# Altium PCB PCB_NEW.PcbDoc
Units mil, origin at the board's own origin, x right, y up, seen from the top; angles counter-clockwise.
Board outline 6000 x 4000 mil, 2 copper layers (Top Layer, Bottom Layer); 215 components, 264 nets, 989 pads, 0 vias.
Unrouted connection lines stored in the file: 651.
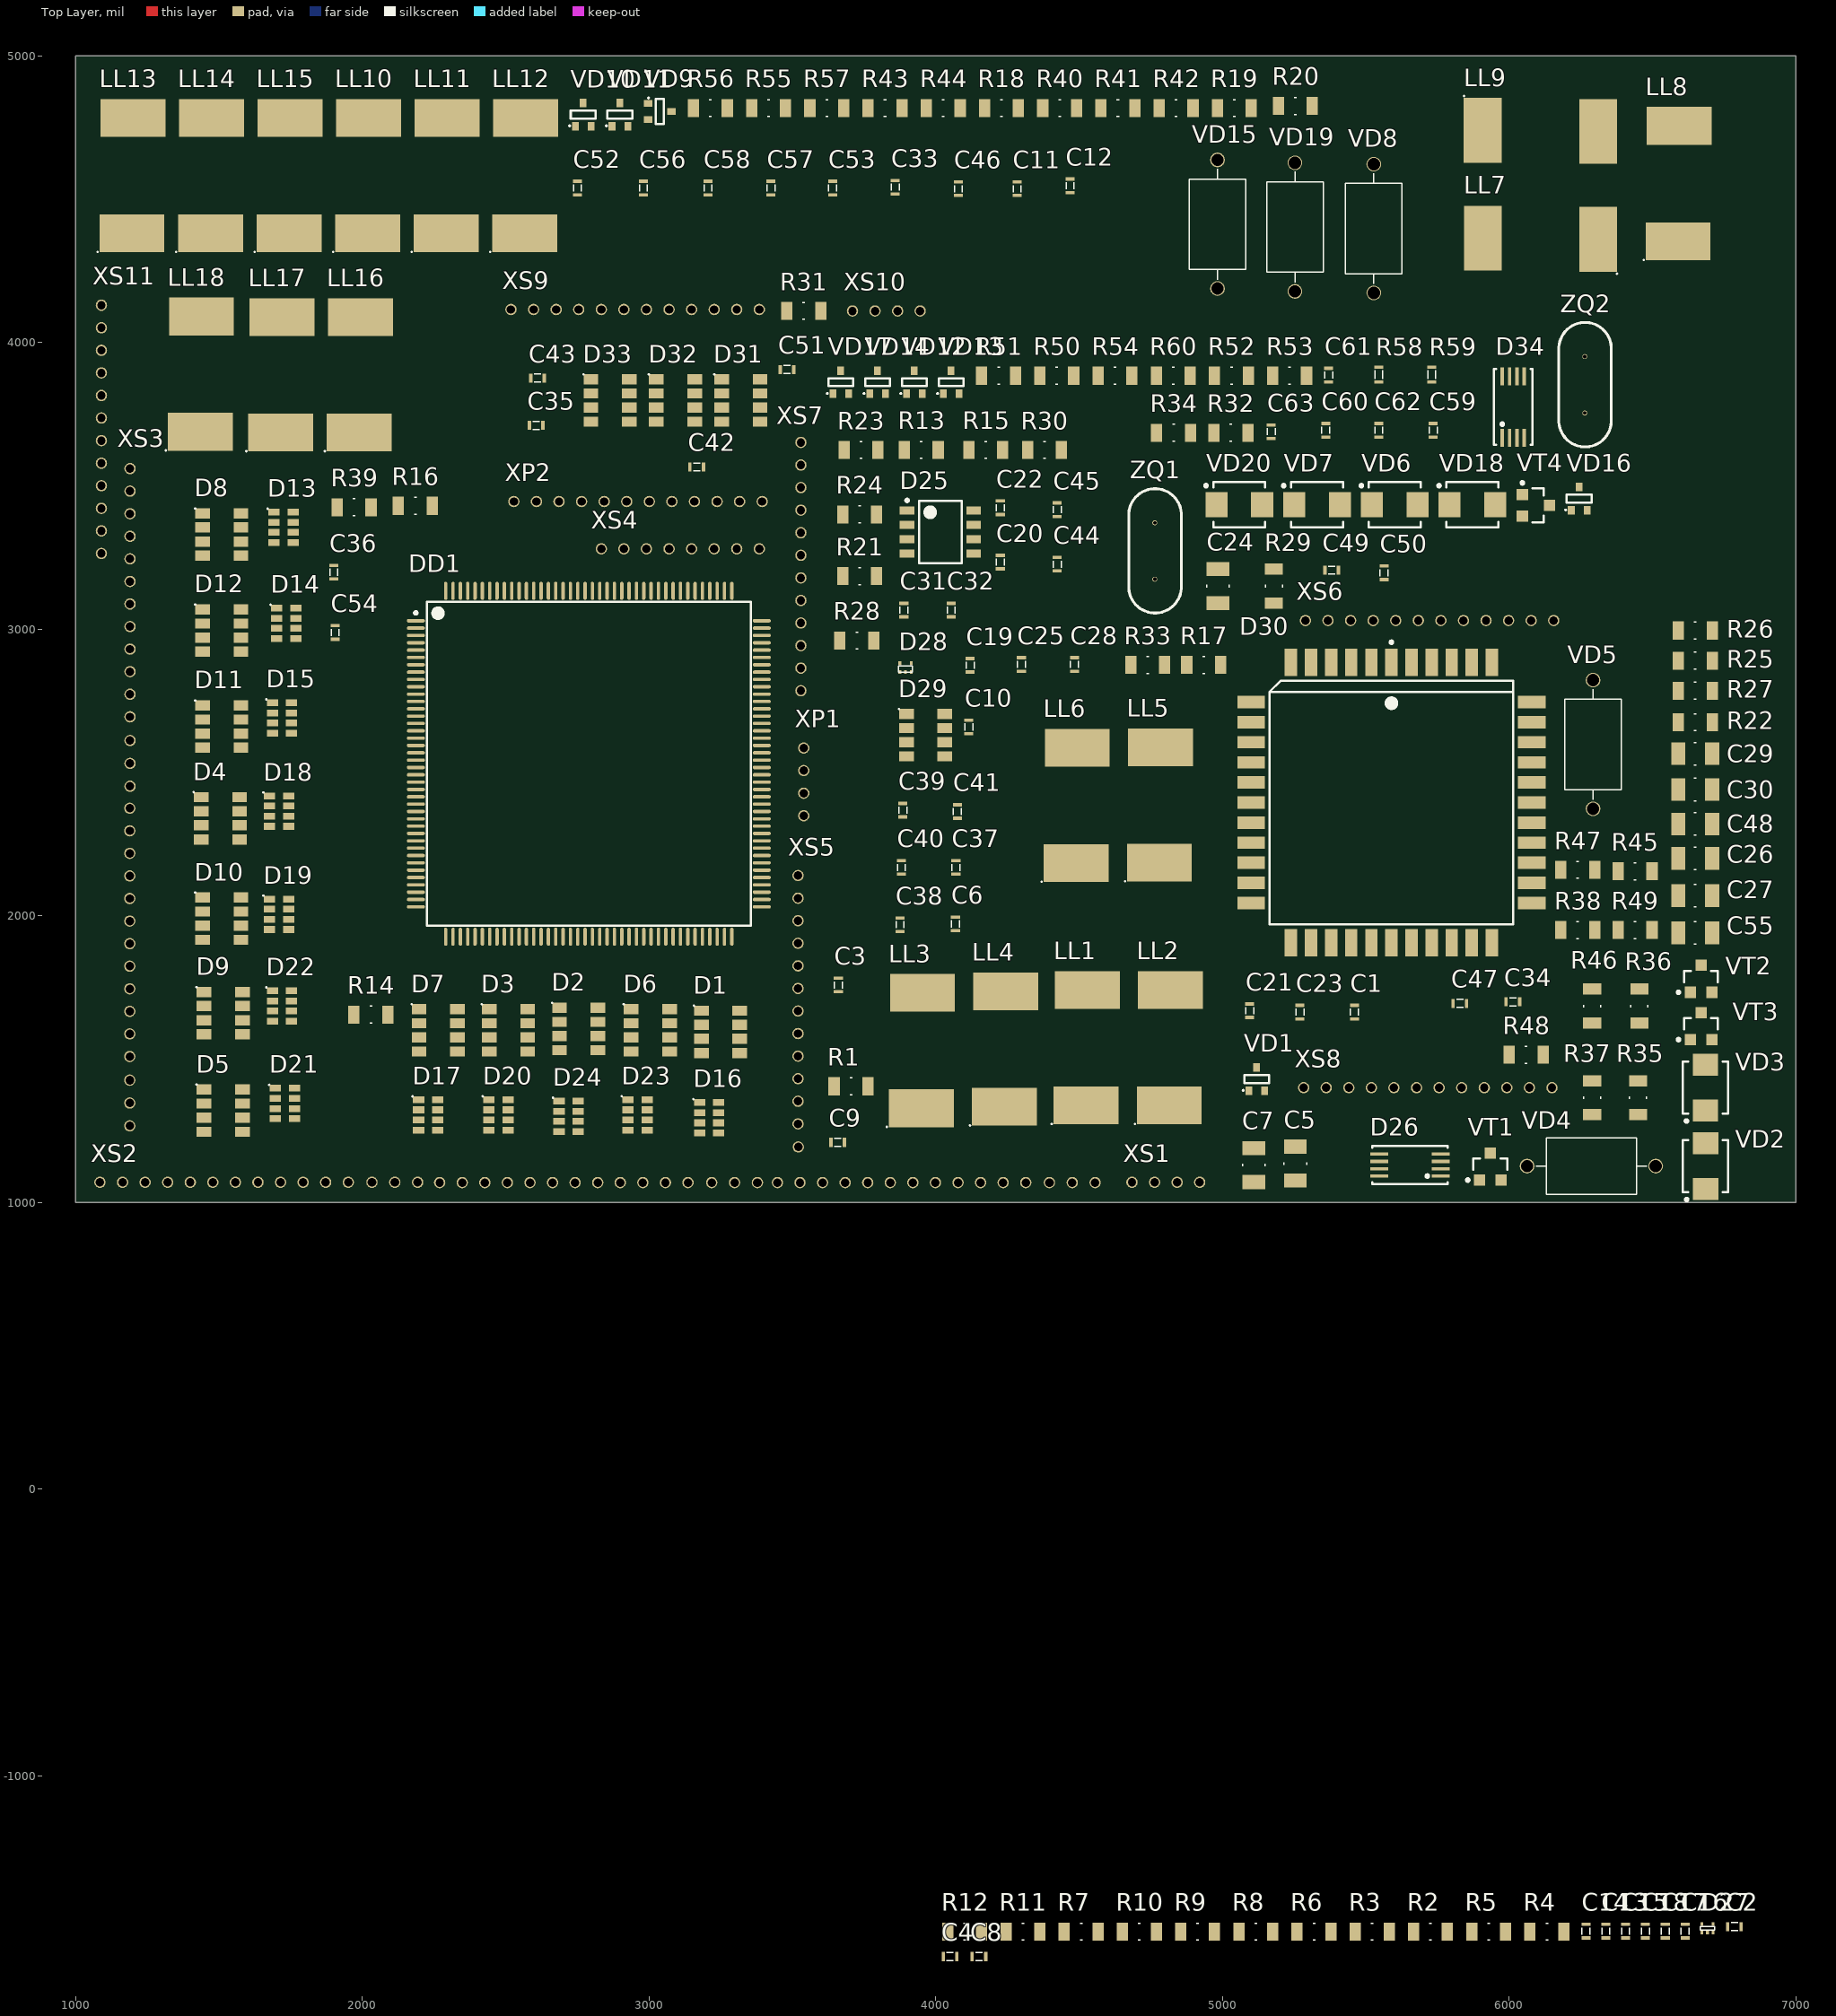
[diagram p0: Top Layer view]
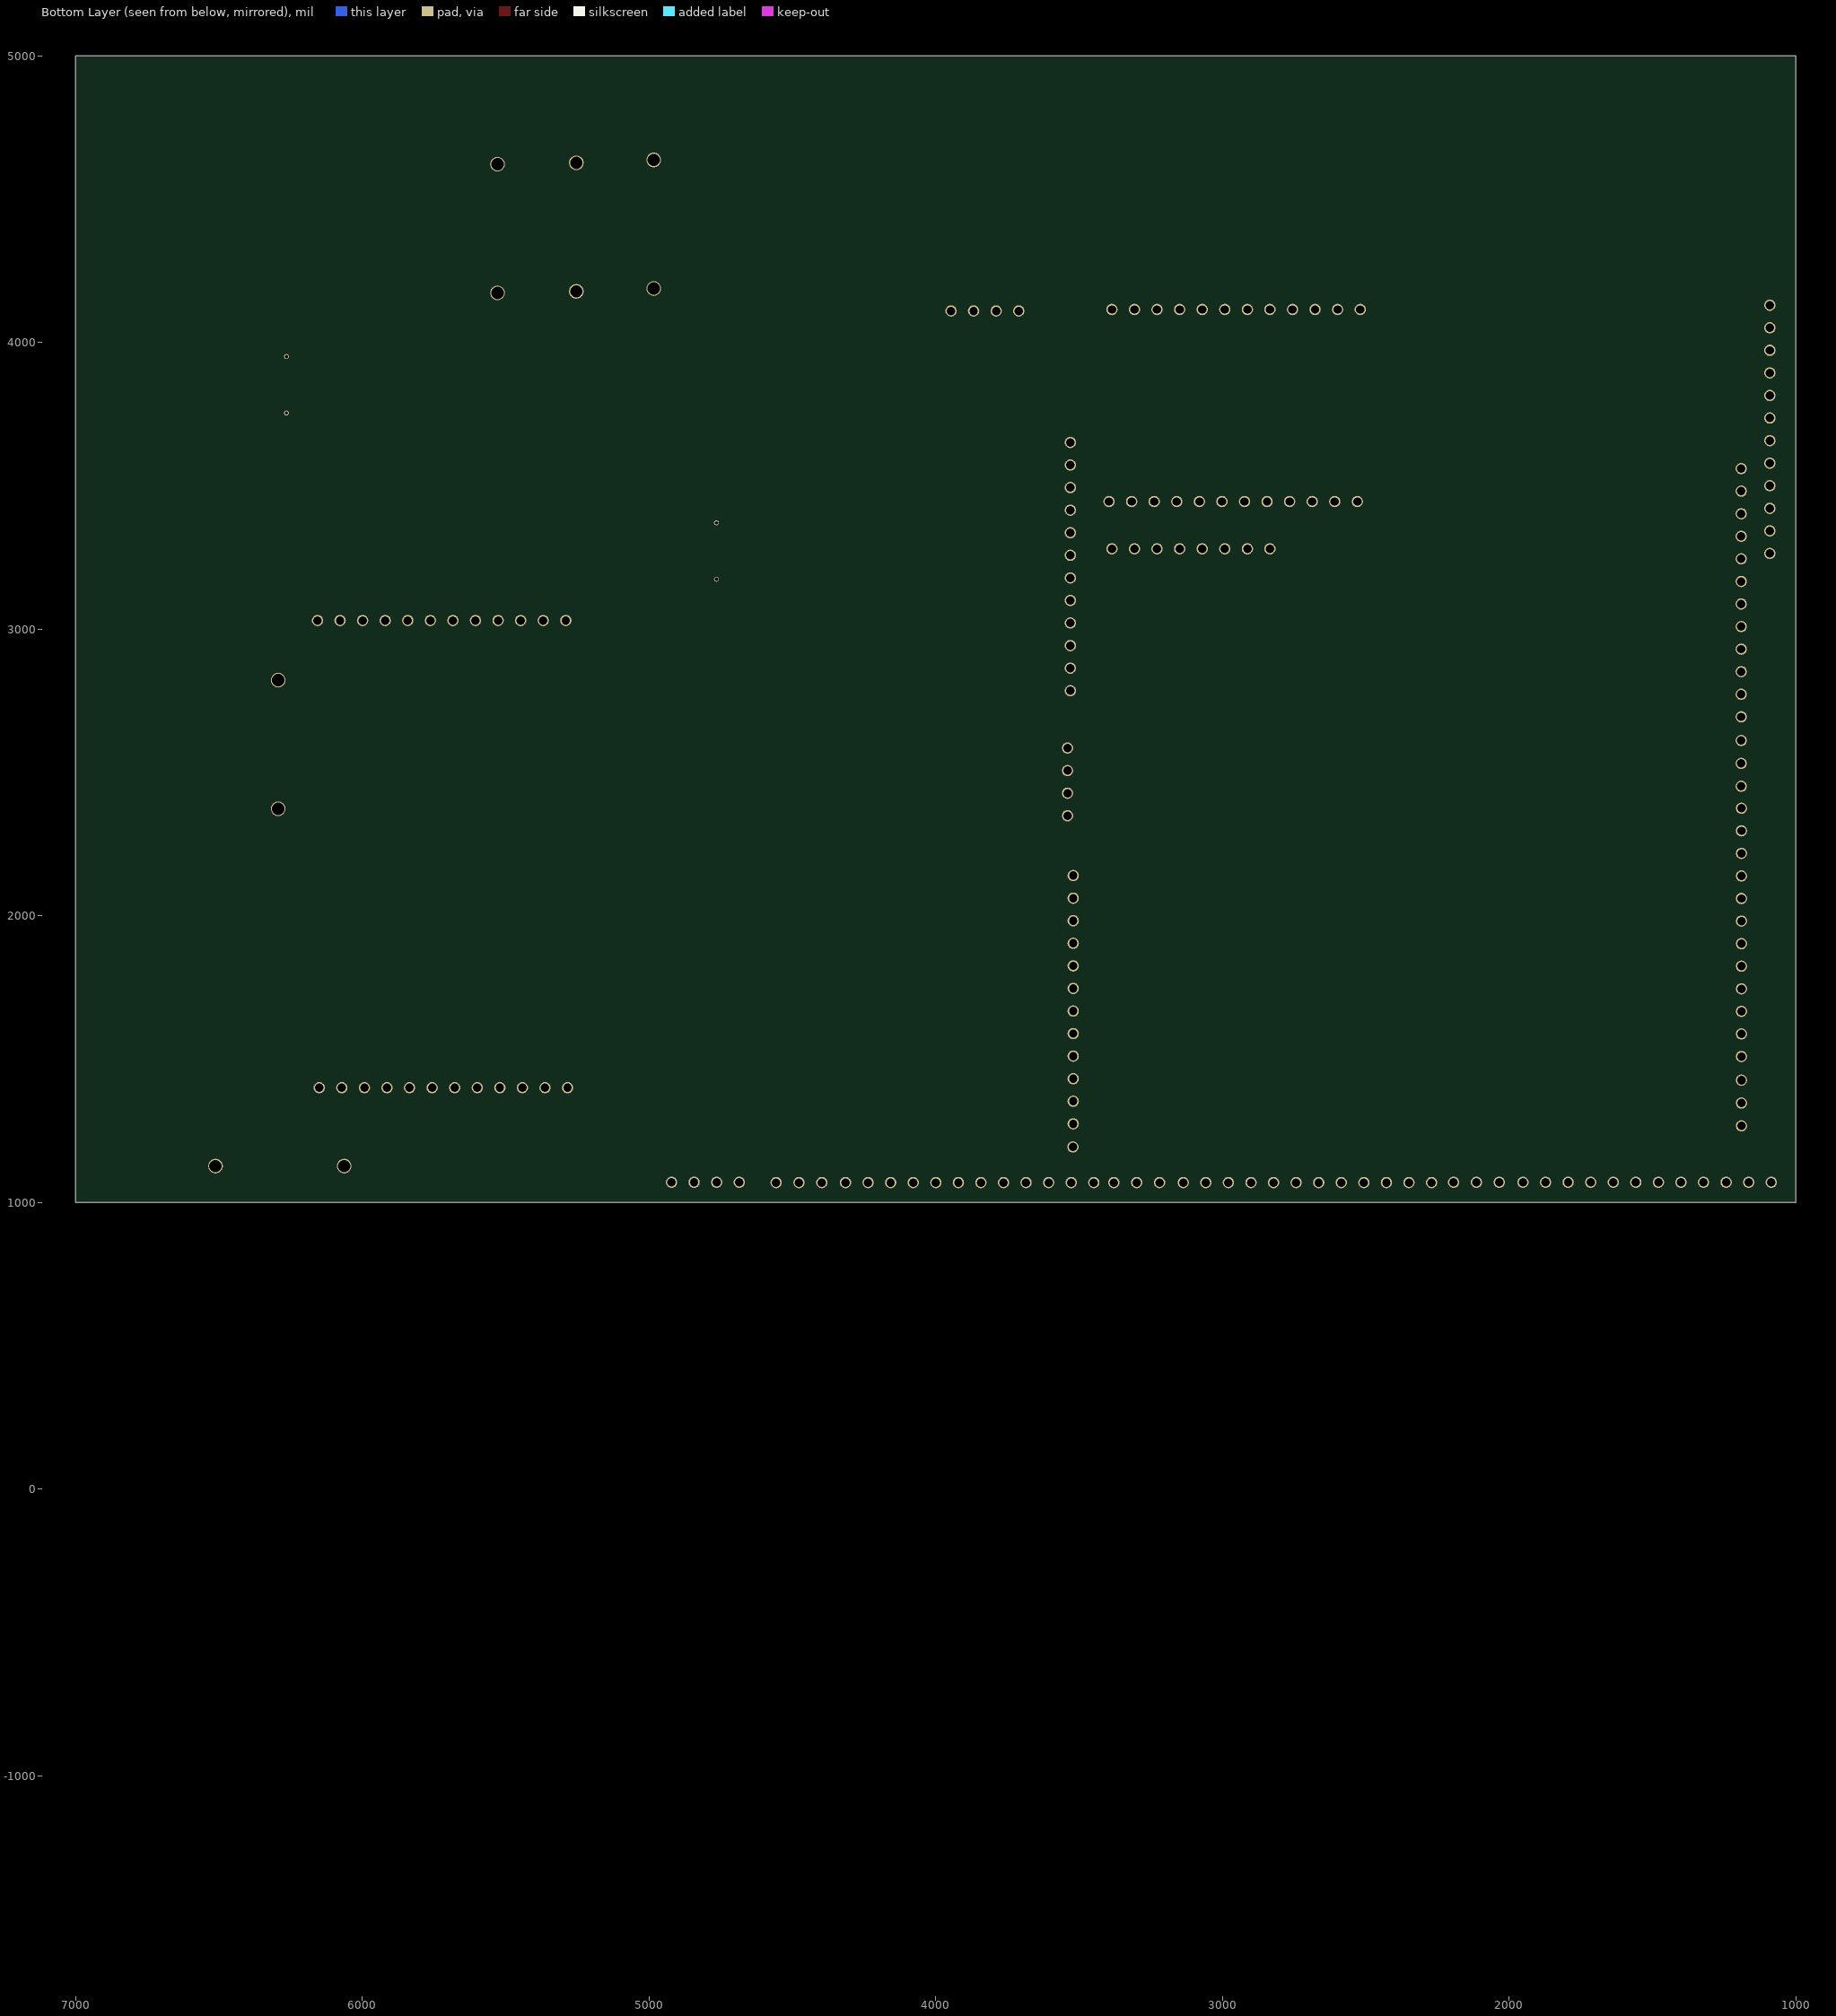
[diagram p1: Bottom Layer view, seen from below]

## Layer stack, top to bottom
Top Solder: solder mask 0.4, Solder Resist, Dk 3.5
Top Layer: signal copper 1.4
Dielectric 1: dielectric 12.6, FR-4, Dk 4.8
Bottom Layer: signal copper 1.4
Bottom Solder: solder mask 0.4, Solder Resist, Dk 3.5

## Board outline
1000,1000 7000,1000 7000,5000 1000,5000

## Design rules (kind name [scope] priority, off if disabled: settings)
Clearance [All] p1: gap=10 ignorepadtopadclearanceinfootprint=FALSE except(0: Arc-Hole Track-Hole SMDPad-Hole THPad-Hole Via-Hole Fill-Hole Poly-Hole Region-Hole Text-Hole)
PolygonConnect [All] p1: connectstyle=Relief reliefconductorwidth=10 reliefentries=4 polygonreliefangle="90 Angle" airgapwidth=10
RoutingVias [All] p1: holewidth=28 width=50 viastyle="Through Hole" minholewidth=28 minwidth=50 maxholewidth=28 maxwidth=50
SolderMaskExpansion [All] p1: expansion=4
Width [All] p1: maxlimit=10 minlimit=10 preferedwidth=10
30 further rules are at their usual default settings.

## Classes and differential pairs
net class VCC: CVDD0
net class GND: AGND GND
net class DATA[0..2]: DATA0 DATA1 DATA2
net class HDATA[0..3]: HDATA0 HDATA1 HDATA2 HDATA3
net class MFB[0..11]: MFB0 MFB1 MFB2 MFB3 MFB4 MFB5 MFB6 MFB7 MFB8 MFB9 MFB10 MFB11
net class PD[0..47]: PD0 PD1 PD2 PD3 PD4 PD5 PD6 PD7 PD8 PD9 PD10 PD11 PD12 PD13 PD14 PD15 PD16 PD17 PD18 PD19 PD20 PD21 PD22 PD23 PD24 PD25 PD26 PD27 PD28 PD29 PD30 PD31 PD32 PD33 PD34 PD35 PD36 PD37 PD38 PD39 PD40 PD41 PD42 PD43 PD44 PD45 PD46 PD47
net class PNL[0..47]: PNL0 PNL1 PNL2 PNL3 PNL4 PNL5 PNL6 PNL7 PNL8 PNL9 PNL10 PNL11 PNL12 PNL13 PNL14 PNL15 PNL16 PNL17 PNL18 PNL19 PNL20 PNL21 PNL22 PNL23 PNL24 PNL25 PNL26 PNL27 PNL28 PNL29 PNL30 PNL31 PNL32 PNL33 PNL34 PNL35 PNL36 PNL37 PNL38 PNL39 PNL40 PNL41 PNL42 PNL43 PNL44 PNL45 PNL46 PNL47

## Components (designator, comment, footprint, x,y, rotation, side; value= is the part's Value field where it differs from the comment)
C1 "Capacitor" cap(0603) 5445,1695 r90 top
C2 "Capacitor" cap(0603) 6817.83,-1510.94 r0 top
C3 "Capacitor" cap(0603) 3645,1790 r90 top
C4 "Capacitor" cap(0603) 4081.85,-1615.59 r0 top
C5 "Capacitor Duga" "Capacitor 0805" 5255,1135 r90 top
C6 "Capacitor" cap(0603) 4085,1940 r270 top
C7 "Capacitor Duga" "Capacitor 0805" 5110,1130 r90 top
C8 "Capacitor" cap(0603) 4182.56,-1615.59 r0 top
C9 "Capacitor" cap(0603) 3690,1225 r0 top
C10 "Capacitor" cap(0603) 4100,2690 r90 top
C11 "Capacitor" cap(0603) 4300,4505 r270 top
C12 "Capacitor" cap(0603) 4485,4515 r270 top
C13 "Capacitor" cap(0603) 6321.85,-1510.94 r90 top
C14 "Capacitor" cap(0603) 6252.64,-1510.94 r90 top
C15 "Capacitor" cap(0603) 6391.06,-1510.94 r90 top
C16 "Capacitor" cap(0603) 6598.7,-1510.94 r90 top
C17 "Capacitor" cap(0603) 6529.49,-1510.94 r90 top
C18 "Capacitor" cap(0603) 6460.27,-1510.94 r90 top
C19 "Capacitor" cap(0603) 4105,2905 r90 top
C20 "Capacitor" cap(0603) 4210,3265 r90 top
C21 "Capacitor" cap(0603) 5080,1700 r90 top
C22 "Capacitor" cap(0603) 4210,3455 r90 top
C23 "Capacitor" cap(0603) 5255,1695 r90 top
C24 "Capacitor Duga" "Capacitor 0805" 4985,3150 r90 top
C25 "Capacitor" cap(0603) 4315,2845 r270 top
C26 "Capacitor" "Capacitor 0805" 6650,2200 r0 top
C27 "Capacitor" "Capacitor 0805" 6650,2070 r0 top
C28 "Capacitor" cap(0603) 4500,2845 r270 top
C29 "Capacitor" "Capacitor 0805" 6650,2565 r0 top
C30 "Capacitor" "Capacitor 0805" 6650,2440 r0 top
C31 "Capacitor" cap(0603) 3905,3035 r270 top
C32 "Capacitor" cap(0603) 4070,3035 r270 top
C33 "Capacitor" cap(0603) 3875,4510 r270 top
C34 "Capacitor" cap(0603) 6045,1715 r0 top
C35 "Capacitor" cap(0603) 2575,3695 r180 top
C36 "Capacitor" cap(0603) 1885,3230 r90 top
C37 "Capacitor" cap(0603) 4055,2200 r90 top
C38 "Capacitor" cap(0603) 3860,2000 r90 top
C39 "Capacitor" cap(0603) 3870,2400 r90 top
C40 "Capacitor" cap(0603) 3865,2200 r90 top
C41 "Capacitor" cap(0603) 4060,2395 r90 top
C42 "Capacitor" cap(0603) 3135,3550 r180 top
C43 "Capacitor" cap(0603) 2580,3860 r180 top
C44 "Capacitor" cap(0603) 4440,3195 r270 top
C45 "Capacitor" cap(0603) 4440,3385 r270 top
C46 "Capacitor" cap(0603) 4095,4505 r270 top
C47 "Capacitor" cap(0603) 5860,1710 r0 top
C48 "Capacitor Duga" "Capacitor 0805" 6650,2320 r0 top
C49 "Capacitor" cap(0603) 5350,3190 r180 top
C50 "Capacitor" cap(0603) 5580,3165 r270 top
C51 "Capacitor" cap(0603) 3450,3890 r180 top
C52 "Capacitor" cap(0603) 2735,4570 r90 top
C53 "Capacitor" cap(0603) 3625,4570 r90 top
C54 "Capacitor" cap(0603) 1890,3020 r90 top
C55 "Capacitor Duga" "Capacitor 0805" 6650,1940 r0 top
C56 "Capacitor" cap(0603) 2965,4570 r90 top
C57 "Capacitor" cap(0603) 3410,4570 r90 top
C58 "Capacitor" cap(0603) 3190,4570 r90 top
C59 "Capacitor" cap(0603) 5720,3725 r90 top
C60 "Capacitor" cap(0603) 5345,3725 r90 top
C61 "Capacitor" cap(0603) 5355.35,3917.32 r90 top
C62 "Capacitor" cap(0603) 5530,3725 r90 top
C63 "Capacitor" cap(0603) 5155,3720 r90 top
D1 "RN" RN 3250,1595 r0 top
D2 "RN" RN 2755,1605 r0 top
D3 "RN" RN 2510,1600 r0 top
D4 "RN" RN 1505,2340 r0 top
D5 "RN" RN 1515,1320 r0 top
D6 "RN" RN 3005,1600 r0 top
D7 "RN" RN 2265,1600 r0 top
D8 "RN" RN 1510,3330 r0 top
D9 "RN" RN 1515,1660 r0 top
D10 "RN" RN 1510,1990 r0 top
D11 "RN" RN 1510,2660 r0 top
D12 "RN" RN 1510,2995 r0 top
D13 "33pFX4" 33pFX4 1725,3355 r0 top
D14 "33pFX4" 33pFX4 1735,3020 r0 top
D15 "33pFX4" 33pFX4 1720,2690 r0 top
D16 "33pFX4" 33pFX4 3210,1295 r0 top
D17 "33pFX4" 33pFX4 2230,1305 r0 top
D18 "33pFX4" 33pFX4 1710,2365 r0 top
D19 "33pFX4" 33pFX4 1710,2005 r0 top
D20 "33pFX4" 33pFX4 2475,1305 r0 top
D21 "33pFX4" 33pFX4 1730,1345 r0 top
D22 "33pFX4" 33pFX4 1720,1685 r0 top
D23 "33pFX4" 33pFX4 2960,1305 r0 top
D24 "33pFX4" 33pFX4 2720,1300 r0 top
D25 "M51953A" M51953A 4015,3340 r0 top
D26 "24LC32" 24LC32 5655,1130 r180 top
D27 "Inverter" Inverter 6692.52,-1532.6 r90 top
D28 "Сonjuncture" Conjuncture 3895,2865 r90 top
D29 "RN" RN 3965,2630 r0 top
D30 "MTV312M64" MTV312M64 5590,2395 r0 top
D31 "RN" RN 3320.87,3797.64 r0 top
D32 "RN" RN 3092.6,3797.64 r0 top
D33 "RN" RN 2864.33,3797.64 r0 top
D34 "24LC32" 24LC32 6015,3775 r90 top
DD1 "gmZAN1_1" GMZAN1 2790,2530 r0 top
LL1 "dros" dros 4530,1540 r90 top
LL2 "dros" dros 4820,1540 r90 top
LL3 "dros" dros 3955,1530 r90 top
LL4 "dros" dros 4245,1535 r90 top
LL5 "dros" dros 4785.55,2386.71 r90 top
LL6 "dros" dros 4495,2385 r90 top
LL7 "dros" dros 6110,4365 r180 top
LL8 "dros" dros 6595,4555 r90 top
LL9 "dros" dros 6110,4735 r0 top
LL10 "dros" dros 2023.42,4582.44 r90 top
LL11 "dros" dros 2297.36,4582.44 r90 top
LL12 "dros" dros 2571.3,4582.44 r90 top
LL13 "dros" dros 1201.61,4582.44 r90 top
LL14 "dros" dros 1475.55,4582.44 r90 top
LL15 "dros" dros 1749.49,4582.44 r90 top
LL16 "dros" dros 1994.49,3887.44 r90 top
LL17 "dros" dros 1720.55,3887.44 r90 top
LL18 "dros" dros 1440,3890 r90 top
R1 "Resistor" "Resistor 1206" 3705,1405 r0 top
R2 "Resistor" "Resistor 1206" 5726.1,-1544.41 r0 top
R3 "Resistor" "Resistor 1206" 5523.03,-1544.41 r0 top
R4 "Resistor" "Resistor 1206" 6132.24,-1544.41 r0 top
R5 "Resistor" "Resistor 1206" 5929.17,-1544.41 r0 top
R6 "Resistor" "Resistor 1206" 5319.96,-1544.41 r0 top
R7 "Resistor" "Resistor 1206" 4507.68,-1544.41 r0 top
R8 "Resistor" "Resistor 1206" 5116.89,-1544.41 r0 top
R9 "Resistor" "Resistor 1206" 4913.82,-1544.41 r0 top
R10 "Resistor" "Resistor 1206" 4710.75,-1544.41 r0 top
R11 "Resistor" "Resistor 1206" 4304.61,-1544.41 r0 top
R12 "Resistor" "Resistor 1206" 4101.54,-1544.41 r0 top
R13 "Resistor" "Resistor 1206" 3950,3625 r0 top
R14 "Resistor" "Resistor 1206" 2030,1655 r0 top
R15 "Resistor" "Resistor 1206" 4175,3625 r0 top
R16 "Resistor" "Resistor 1206" 2185,3430 r0 top
R17 "Resistor" "Resistor 1206" 4935,2875 r180 top
R18 "Resistor" "Resistor 1206" 4229.64,4817.68 r0 top
R19 "Resistor" "Resistor 1206" 5041.93,4817.68 r0 top
R20 "Resistor" "Resistor 1206" 5255,4825 r0 top
R21 "Resistor" "Resistor 1206" 3735,3185 r180 top
R22 "Resistor" "Resistor 1206" 6650,2675 r0 top
R23 "Resistor" "Resistor 1206" 3740,3625 r0 top
R24 "Resistor" "Resistor 1206" 3735,3400 r0 top
R25 "Resistor" "Resistor 1206" 6650,2890 r180 top
R26 "Resistor" "Resistor 1206" 6650,2995 r180 top
R27 "Resistor" "Resistor 1206" 6650,2785 r0 top
R28 "Resistor" "Resistor 1206" 3725,2960 r180 top
R29 "Resistor" "Resistor 1206" 5180,3150 r270 top
R30 "Resistor" "Resistor 1206" 4380,3625 r0 top
R31 "Resistor" "Resistor 1206" 3540,4110 r180 top
R32 "Resistor" "Resistor 1206" 5030,3685 r180 top
R33 "Resistor" "Resistor 1206" 4740,2875 r0 top
R34 "Resistor" "Resistor 1206" 4830,3685 r180 top
R35 "Resistor" "Resistor 1206" 6450,1365 r270 top
R36 "Resistor" "Resistor 1206" 6455,1685 r90 top
R37 "Resistor" "Resistor 1206" 6290,1365 r270 top
R38 "Resistor" "Resistor 1206" 6240,1950 r180 top
R39 "Resistor" "Resistor 1206" 1971.54,3425.2 r0 top
R40 "Resistor" "Resistor 1206" 4432.72,4817.68 r0 top
R41 "Resistor" "Resistor 1206" 4635.79,4817.68 r0 top
R42 "Resistor" "Resistor 1206" 4838.86,4817.68 r0 top
R43 "Resistor" "Resistor 1206" 3823.5,4817.68 r0 top
R44 "Resistor" "Resistor 1206" 4026.57,4817.68 r0 top
R45 "Resistor" "Resistor 1206" 6440,2155 r180 top
R46 "Resistor" "Resistor 1206" 6290,1685 r90 top
R47 "Resistor" "Resistor 1206" 6240,2160 r180 top
R48 "Resistor" "Resistor 1206" 6060,1515 r0 top
R49 "Resistor" "Resistor 1206" 6440,1950 r0 top
R50 "Resistor" "Resistor 1206" 4422.68,3883.86 r0 top
R51 "Resistor" "Resistor 1206" 4219.61,3883.86 r0 top
R52 "Resistor" "Resistor 1206" 5031.89,3883.86 r0 top
R53 "Resistor" "Resistor 1206" 5234.96,3883.86 r0 top
R54 "Resistor" "Resistor 1206" 4625.75,3883.86 r0 top
R55 "Resistor" "Resistor 1206" 3417.36,4817.68 r0 top
R56 "Resistor" "Resistor 1206" 3214.29,4817.68 r0 top
R57 "Resistor" "Resistor 1206" 3620.43,4817.68 r0 top
R58 "Res" res(0603) 5530,3920 r90 top
R59 "Res" res(0603) 5715,3920 r90 top
R60 "Resistor" "Resistor 1206" 4828.82,3883.86 r0 top
VD1 "2SK3018" DAT17 5120,1430 r90 top
VD2 "Diode" DIODE 6685.63,1125.98 r90 top
VD3 "Diode" DIODE 6685,1400 r90 top
VD4 "Diode(shotki)" Diode(shotki) 6445,1225 r0 top
VD5 "Diode(shotki)" Diode(shotki) 6195,2755 r90 top
VD6 "Diode" DIODE 5601.18,3434.37 r0 top
VD7 "Diode" DIODE 5330.2,3434.37 r0 top
VD8 "Diode(shotki)" Diode(shotki) 5430,4555 r90 top
VD9 "DAN17" DAT17 3037.79,4805.87 r0 top
VD10 "DAN17" DAT17 2770.43,4795.04 r90 top
VD11 "DAN17" DAT17 2898.7,4795.04 r90 top
VD12 "2SK3018" DAT17 3925.67,3861.22 r90 top
VD13 "2SK3018" DAT17 4053.94,3861.22 r90 top
VD14 "DAN17" DAT17 3797.4,3861.22 r90 top
VD15 "Diode(shotki)" Diode(shotki) 4885,4570 r90 top
VD16 "2SK3018" DAT17 6244.84,3455.04 r90 top
VD17 "2SK3018" DAT17 3669.13,3861.22 r90 top
VD18 "Diode" DIODE 5872.16,3434.37 r0 top
VD19 "Diode(shotki)" Diode(shotki) 5155,4560 r90 top
VD20 "Diode" DIODE 5059.21,3434.37 r0 top
VT1 "Transistor 2_1" "Transistor 1" 5935,1125 r90 top
VT2 "Transistor 2_1" "Transistor 1" 6670,1780 r90 top
VT3 "Transistor 2_1" "Transistor 1" 6670,1615 r90 top
VT4 "Transistor 2_1" "Transistor 1" 6093.94,3431.42 r0 top
XP1 "All pins_1" "Header 4" 3540,2585 r0 top
XP2 "XP-2-I306B" "All pins" 3395,3445 r270 top
XS1 "Header 4" "Header 4" 4685,1070 r90 top
XS2 "Header 45" "Header 45" 1085,1070 r90 top
XS3 "Header 30" "Header 30" 1190,3560 r0 top
XS4 "XS-2-I306B" "Header 8" 3385,3280 r270 top
XS5 "XS-2-I306C" "header 13" 3520,2140 r0 top
XS6 "All pins_2" "All pins" 5290,3030 r90 top
XS7 "Header 8" "All pins" 3530,2785 r180 top
XS8 "Header 8_1" "All pins" 6150,1400 r270 top
XS9 "Header 12" "All pins" 3385,4115 r270 top
XS10 "Header 4" "Header 4" 3710,4110 r90 top
XS11 "Header 15" "All pins" 1090,4130 r0 top
ZQ1 "Quartz" HC-49/U 4670,3485 r90 top
ZQ2 "Quartz" HC-49/U 6170,4065 r90 top

## Footprints (in the part's own frame and the unit in brackets; to place one, negate y for a bottom-side part, rotate by r counter-clockwise, add the part's x,y. Pads: shape width x height; smd on the part's side, far side on the other; paste and mask are expansions set on the pad)
24LC32 [mm] "SON, 8-Leads, Body 3,10x6,40mm, Pitch 0,65mm, IPC Medium Density"
  rect 1.6x0.3 smd: 1(-2.725,0.975) 2(-2.725,0.325) 3(-2.725,-0.325) 4(-2.725,-0.975) 5(2.725,-0.975) 6(2.725,-0.325) 7(2.725,0.325) 8(2.725,0.975)
  silkscreen extent -3.35,-1.7 3.35,1.7
33pFX4 [mm]
  rect 1x0.6 smd: 1(-0.85,1.35) 2(-0.85,0.45) 3(-0.85,-0.45) 4(-0.85,-1.35) 5(0.85,-1.35) 6(0.85,-0.45) 7(0.85,0.45) 8(0.85,1.35)
  silkscreen extent -1.45,1.6 -1.35,1.7
"All pins" [mm]
  round 1 hole 0.75: 1(0,0) 2(0,-2) 3(0,-4) 4(0,-6) 5(0,-8) 6(0,-10) 7(0,-12) 8(0,-14) 9(0,-16) 10(0,-18) 11(0,-20) 12(0,-22)
cap(0603) [mm]
  rect 0.3x0.8 smd: 1(-1.4,-0.4) 2(-0.2,-0.4)
  silkscreen extent -1.1,-0.75 -0.5,-0.05
"Capacitor 0805" [mm]
  rect 1.25x2 smd: 1(-1.5,0) 2(1.5,0)
  silkscreen extent -0.1,-1 0.1,1
Conjuncture [mm]
  rect 0.35x0.25 smd: 1(-0.375,0.5) 2(-0.375,0) 3(-0.375,-0.5) 4(0.4,-0.5) 5(0.4,0.5)
  silkscreen extent -0.4,-0.63 0.15,0.65
DAT17 [mm] "SOT223, 3-Leads, Body 2,20x1,90mm (avg), Pitch 1,40mm, IPC Medium Density"
  rect 0.75x0.6 smd: 1(-1.025,0.7) 2(-1.025,-0.7) 3(1.025,0)
  silkscreen extent -1.06,-1.1 0.35,1.26
DIODE [mm]
  rect 1.95x2.25 smd: 1(-2.025,0) 2(2.025,0)
  silkscreen extent -3.07,-2 2.3,2
Diode(shotki) [mm]
  round 1.3 hole 1.1: 1(-9.7,-2.5) 2(1.7,-2.5)
  silkscreen extent -8.9,-5 0.9,0
dros [mm] "SODFL, 2-Leads, Body 6,00x13,20mm, IPC Medium Density"
  rect 3.35x5.75 smd: 1(-5.125,0.125) 2(5.1,0.025)
  silkscreen extent -6.82,3.13 -6.73,3.22
GMZAN1 [mm] "QFP, 160-Leads, Body 27,90x27,90mm, Pitch 0,65mm, IPC Medium Density"
  oval 1.6x0.3 smd: 1(-15.325,12.675) 2(-15.325,12.025) 3(-15.325,11.375) 4(-15.325,10.725) 5(-15.325,10.075) 6(-15.325,9.425) 7(-15.325,8.775) 8(-15.325,8.125) 9(-15.325,7.475) 10(-15.325,6.825) 11(-15.325,6.175) 12(-15.325,5.525) 13(-15.325,4.875) 14(-15.325,4.225) 15(-15.325,3.575) 16(-15.325,2.925) 17(-15.325,2.275) 18(-15.325,1.625) 19(-15.325,0.975) 20(-15.325,0.325) 21(-15.325,-0.325) 22(-15.325,-0.975) 23(-15.325,-1.625) 24(-15.325,-2.275) 25(-15.325,-2.925) 26(-15.325,-3.575) 27(-15.325,-4.225) 28(-15.325,-4.875) 29(-15.325,-5.525) 30(-15.325,-6.175) 31(-15.325,-6.825) 32(-15.325,-7.475) 33(-15.325,-8.125) 34(-15.325,-8.775) 35(-15.325,-9.425) 36(-15.325,-10.075) 37(-15.325,-10.725) 38(-15.325,-11.375) 39(-15.325,-12.025) 40(-15.325,-12.675) 81(15.325,-12.675) 82(15.325,-12.025) 83(15.325,-11.375) 84(15.325,-10.725) 85(15.325,-10.075) 86(15.325,-9.425) 87(15.325,-8.775) 88(15.325,-8.125) 89(15.325,-7.475) 90(15.325,-6.825) 91(15.325,-6.175) 92(15.325,-5.525) 93(15.325,-4.875) 94(15.325,-4.225) 95(15.325,-3.575) 96(15.325,-2.925) 97(15.325,-2.275) 98(15.325,-1.625) 99(15.325,-0.975) 100(15.325,-0.325) 101(15.325,0.325) 102(15.325,0.975) 103(15.325,1.625) 104(15.325,2.275) 105(15.325,2.925) 106(15.325,3.575) 107(15.325,4.225) 108(15.325,4.875) 109(15.325,5.525) 110(15.325,6.175) 111(15.325,6.825) 112(15.325,7.475) 113(15.325,8.125) 114(15.325,8.775) 115(15.325,9.425) 116(15.325,10.075) 117(15.325,10.725) 118(15.325,11.375) 119(15.325,12.025) 120(15.325,12.675)
  oval 0.3x1.6 smd: 41(-12.675,-15.325) 42(-12.025,-15.325) 43(-11.375,-15.325) 44(-10.725,-15.325) 45(-10.075,-15.325) 46(-9.425,-15.325) 47(-8.775,-15.325) 48(-8.125,-15.325) 49(-7.475,-15.325) 50(-6.825,-15.325) 51(-6.175,-15.325) 52(-5.525,-15.325) 53(-4.875,-15.325) 54(-4.225,-15.325) 55(-3.575,-15.325) 56(-2.925,-15.325) 57(-2.275,-15.325) 58(-1.625,-15.325) 59(-0.975,-15.325) 60(-0.325,-15.325) 61(0.325,-15.325) 62(0.975,-15.325) 63(1.625,-15.325) 64(2.275,-15.325) 65(2.925,-15.325) 66(3.575,-15.325) 67(4.225,-15.325) 68(4.875,-15.325) 69(5.525,-15.325) 70(6.175,-15.325) 71(6.825,-15.325) 72(7.475,-15.325) 73(8.125,-15.325) 74(8.775,-15.325) 75(9.425,-15.325) 76(10.075,-15.325) 77(10.725,-15.325) 78(11.375,-15.325) 79(12.025,-15.325) 80(12.675,-15.325) 121(12.675,15.325) 122(12.025,15.325) 123(11.375,15.325) 124(10.725,15.325) 125(10.075,15.325) 126(9.425,15.325) 127(8.775,15.325) 128(8.125,15.325) 129(7.475,15.325) 130(6.825,15.325) 131(6.175,15.325) 132(5.525,15.325) 133(4.875,15.325) 134(4.225,15.325) 135(3.575,15.325) 136(2.925,15.325) 137(2.275,15.325) 138(1.625,15.325) 139(0.975,15.325) 140(0.325,15.325) 141(-0.325,15.325) 142(-0.975,15.325) 143(-1.625,15.325) 144(-2.275,15.325) 145(-2.925,15.325) 146(-3.575,15.325) 147(-4.225,15.325) 148(-4.875,15.325) 149(-5.525,15.325) 150(-6.175,15.325) 151(-6.825,15.325) 152(-7.475,15.325) 153(-8.125,15.325) 154(-8.775,15.325) 155(-9.425,15.325) 156(-10.075,15.325) 157(-10.725,15.325) 158(-11.375,15.325) 159(-12.025,15.325) 160(-12.675,15.325)
  silkscreen extent -15.45,-14.35 14.35,14.35
HC-49/U [mm]
  round 0.43 hole 0.3: 1(-7.9,-2.4) 2(-2.9,-2.4)
  silkscreen extent -10.9,-4.75 0.12,-0.1
"Header 4" [mm]
  round 1 hole 0.75: 1(0,0) 2(0,-2) 3(0,-4) 4(0,-6)
"Header 8" [mm]
  round 1 hole 0.75: 1(0,0) 2(0,-2) 3(0,-4) 4(0,-6) 5(0,-8) 6(0,-10) 7(0,-12) 8(0,-14)
"header 13" [mm]
  round 1 hole 0.75: 1(0,0) 2(0,-2) 3(0,-4) 4(0,-6) 5(0,-8) 6(0,-10) 7(0,-12) 8(0,-14) 9(0,-16) 10(0,-18) 11(0,-20) 12(0,-22) 13(0.025,-24.05)
"Header 30" [mm]
  round 1 hole 0.75: 1(0,0) 2(0,-2) 3(0,-4) 4(0,-6) 5(0,-8) 6(0,-10) 7(0,-12) 8(0,-14) 9(0,-16) 10(0,-18) 11(0,-20) 12(0,-22) 16(-0.025,-30.1) 17(-0.025,-32.1) 18(-0.025,-34.1) 19(-0.025,-36.1) 20(-0.025,-38.1) 22(-0.025,-42.1) 23(-0.025,-44.1) 24(-0.025,-46.1) 25(-0.025,-48.1) 26(-0.025,-50.1) 27(-0.025,-52.1)
  round 1 hole 0.762: 13(0,-24.1) 14(0,-26.125) 15(0,-28.15) 28(-0.025,-54.2) 29(-0.025,-56.225) 30(-0.025,-58.25)
  round 1 hole 0.75 mask+0.102: 21(-0.025,-40.1)
"Header 45" [mm]
  round 1 hole 0.75: 1(0,0) 2(0,-2) 3(0,-4) 4(0,-6) 5(0,-8) 6(0,-10) 7(0,-12) 8(0,-14) 9(0,-16) 10(0,-18) 11(0,-20) 12(0,-22) 16(-0.025,-30.1) 17(-0.025,-32.1) 18(-0.025,-34.1) 19(-0.025,-36.1) 20(-0.025,-38.1) 22(-0.025,-42.1) 23(-0.025,-44.1) 24(-0.025,-46.1) 25(-0.025,-48.1) 26(-0.025,-50.1) 27(-0.025,-52.1) 31(-0.025,-60.025) 32(-0.025,-62.025) 33(-0.025,-64.025) 34(-0.025,-66.025) 35(-0.025,-68.025) 37(-0.025,-72.025) 38(-0.025,-74.025) 39(-0.025,-76.025) 40(-0.025,-78.025) 41(-0.025,-80.025) 42(-0.025,-82.025)
  round 1 hole 0.762: 13(0,-24.1) 14(0,-26.125) 15(0,-28.15) 28(-0.025,-54.2) 29(-0.025,-56.225) 30(-0.025,-58.25) 43(-0.025,-84.125) 44(-0.025,-86.15) 45(-0.025,-88.175)
  round 1 hole 0.75 mask+0.102: 21(-0.025,-40.1) 36(-0.025,-70.025)
Inverter [mm]
  rect 0.35x0.25 smd: 1(-0.375,0.5) 2(-0.375,0) 3(-0.375,-0.5) 4(0.375,-0.5) 5(0.375,0.5)
  silkscreen extent -0.15,-0.63 0.15,0.65
M51953A [mm]
  rect 1.3x0.7 smd: 1(-2.909,1.867) 2(-2.909,0.597) 3(-2.909,-0.673) 4(-2.909,-1.943) 5(2.991,-1.943) 6(2.991,-0.673) 7(2.991,0.597) 8(2.991,1.867)
  silkscreen extent -3.03,-2.79 1.94,2.89
MTV312M64 [mm] "Leaded Chip Carrier, 44-Leads, Body 26,40x26,40mm, Pitch 1,780mm, IPC Medium Density"
  rect 1.1x2.45 smd: 1(0,12.425) 2(-1.78,12.425) 3(-3.56,12.425) 4(-5.34,12.425) 5(-7.12,12.425) 6(-8.9,12.425) 18(-8.9,-12.425) 19(-7.12,-12.425) 20(-5.34,-12.425) 21(-3.56,-12.425) 22(-1.78,-12.425) 23(0,-12.425) 24(1.78,-12.425) 25(3.56,-12.425) 26(5.34,-12.425) 27(7.12,-12.425) 28(8.9,-12.425) 40(8.9,12.425) 41(7.12,12.425) 42(5.34,12.425) 43(3.56,12.425) 44(1.78,12.425)
  rect 2.45x1.1 smd: 7(-12.425,8.9) 8(-12.425,7.12) 9(-12.425,5.34) 10(-12.425,3.56) 11(-12.425,1.78) 12(-12.425,0) 13(-12.425,-1.78) 14(-12.425,-3.56) 15(-12.425,-5.34) 16(-12.425,-7.12) 17(-12.425,-8.9) 29(12.425,-8.9) 30(12.425,-7.12) 31(12.425,-5.34) 32(12.425,-3.56) 33(12.425,-1.78) 34(12.425,0) 35(12.425,1.78) 36(12.425,3.56) 37(12.425,5.34) 38(12.425,7.12) 39(12.425,8.9)
  silkscreen extent -10.8,-10.8 10.8,14.32
res(0603) [mm]
  rect 0.3x0.8 smd: 1(-1.475,-0.4) 2(-0.15,-0.4)
  silkscreen extent -1.17,-0.75 -0.45,-0.05
"Resistor 1206" [mm]
  rect 1x1.6 smd: 1(-1.5,0) 2(1.5,0)
  silkscreen extent -0.1,-0.75 0.1,0.75
RN [mm] "Chip Array, Flat, 8-Leads, Pitch 1,25mm,  Body 4,65x3,70mm,  IPC Medium Density"
  rect 1.3x0.9 smd: 1(-1.7,1.875) 2(-1.7,0.625) 3(-1.7,-0.625) 4(-1.7,-1.875) 5(1.7,-1.875) 6(1.7,-0.625) 7(1.7,0.625) 8(1.7,1.875)
  silkscreen extent -2.41,2.26 -2.31,2.36
"Transistor 1" [mm]
  rect 1x1 smd: 1(-1.2,0.95) 2(-1.2,-0.95) 3(1.2,0)
  silkscreen extent -1.32,-1.5 0.7,2.12

## Nets (pads, with @x,y where several pads share a name; then routed paths per layer and width w, separated by ;. In a path a pad name is that pad's centre, name@x,y a point inside that pad or via, vN(x,y) a via of type N, cw(c..) or ccw(c..) an arc to the next point about the centre after c; other vN are vias at no path point)
AGND: C29.1 C30.1 C56.1 C57.1 C58.1 R35.2 R36.1 R55.1 R56.1 R57.1 VD2.1 VD3.1 VD4.1 VD5.1 VD9.2 VD10.2 VD11.2 XS11.4 XS11.5 XS11.6 XS11.7 XS11.8 XS11.11
CVDD0: C46.2 C56.2 C57.2 C58.2 C63.2 D29.5 D29.6 D29.7 D29.8 D31.8 D33.5 D33.6 D33.7 D33.8 LL2.1 R32.2 R34.2 VD9.1 VD10.1 VD11.1 VD14.1 XS9.8
DATA0: DD1.118 XS7.4
DATA1: DD1.119 XS7.5
DATA2: DD1.120 XS7.6
DE: C9.1 R14.1 XS2.42
FLM: C12.1 R19.2 XS2.40
FSW: DD1.122 XS8.6
GND: C1.1 C3.1 C4.1 C5.1 C6.1 C7.1 C7.2 C8.1 C8.2 C9.2 C10.2 C11.2 C12.2 C13.1 C14.1 C14.2 C15.1 C16.1 C17.1 C18.1 C19.1 C20.1 C22.1 C25.2 C26.1 C27.1 C28.1 C31.1 C32.1 C33.1 C34.1 C35.1 C42.1 C43.1 C44.1 C45.1 C46.1 C47.1 C48.1 C49.1 C50.1 C51.1 C55.1 C59.1 C60.2 C61.1 C62.1 C63.1 D13.5 D13.6 D13.7 D13.8 D14.5 D14.6 D14.7 D14.8 D15.5 D15.6 D15.7 D15.8 D16.5 D16.6 D16.7 D16.8 D17.5 D17.6 D17.7 D17.8 D18.5 D18.6 D18.7 D18.8 D19.5 D19.6 D19.7 D19.8 D20.5 D20.6 D20.7 D20.8 D21.5 D21.6 D21.7 D21.8 D22.5 D22.6 D22.7 D22.8 D23.5 D23.6 D23.7 D23.8 D24.5 D24.6 D24.7 D24.8 D25.4 D25.7 D26.1 D26.2 D26.3 D26.4 D26.7 D26.8 D27.3 D27.5 D28.3 D28.5 D30.8 D34.1 D34.2 D34.3 D34.4 DD1.1 DD1.8 DD1.18 DD1.30 DD1.41 DD1.49 DD1.61 DD1.72 DD1.114 DD1.117 DD1.126 DD1.140 DD1.151 DD1.158 DD1.159 DD1.160 LL1.1 LL9.2 R1.1 R6.1 R7.1 R8.1 R9.1 R10.2 R13.1 R17.1 R22.1 R27.1 R30.2 R31.1 R32.1 R38.1 R47.1 VD7.1 VD8.1 VD14.2 VD15.1 VD18.1 VD19.1 VD20.1 VT1.2 VT1.3 VT2.1 VT3.1 VT4.2 XS1.1 XS1.4 XS2.10 XS2.15 XS2.20 XS2.25 XS2.30 XS2.35 XS2.37 XS2.39 XS2.41 XS2.43 XS2.45 XS3.5 XS3.10 XS3.15 XS3.20 XS3.25 XS3.30 XS5.13 XS8.3 XS8.4 XS9.11 XS9.12
HCLK: D28.2 D30.22
HDATA0: D29.4 DD1.99
HDATA1: D29.3 DD1.105
HDATA2: D29.2 DD1.104
HDATA3: D29.1 DD1.102
HFS: D30.23 DD1.98
HREF: DD1.115 R24.1 XS7.1
IRQ: D30.19 DD1.101
LP: C11.1 R18.2 XS2.38
MFB0: D32.1 DD1.113
MFB1: D32.2 DD1.112
MFB2: D32.3 DD1.111
MFB3: D32.4 DD1.110
MFB4: DD1.109 R23.1
MFB5: D31.4 DD1.107
MFB6: D31.3 DD1.106
MFB10: D31.1 DD1.124
MFB11: D31.2 DD1.123
NetC1_2: C1.2 LL3.1 VD1.1
NetC2_1: C2.1 R2.2 R3.1 VD1.2
NetC2_2: C2.2 C4.2 C5.2 LL1.2 LL2.2 R3.2 VD1.3
NetC3_2: C3.2 LL3.2 LL4.1
NetC13_2: C13.2 D30.28 R4.2 R7.2
NetC15_2: C15.2 D30.29 R5.2 R6.2
NetC16_2: C16.2 D26.5 R12.1
NetC17_2: C17.2 D25.5
NetC18_2: C18.2 D26.6 R11.1
NetC20_2: C20.2 LL5.2 LL6.1
NetC21_1: C21.1 C23.2
NetC21_2: C21.2 D30.12 ZQ1.1
NetC22_2: C22.2 R15.1
NetC23_1: C23.1 D30.11 XS6.7 ZQ1.2
NetC24_1: C24.1 C25.1 D30.10
NetC24_2: C24.2 D30.4
NetC26_2: C26.2 DD1.142 ZQ2.1
NetC27_2: C27.2 R16.2 XP2.6 ZQ2.2
NetC29_2: C29.2 DD1.148 R25.1
NetC30_2: C30.2 DD1.150 R26.1
NetC31_2: C31.2 C32.2 R21.2 R28.2 XS7.7 XS7.8
NetC33_2: C33.2 D32.8 D33.1 XS9.3
NetC34_2: C34.2 R37.2 XS9.2
NetC35_2: C35.2 D32.7 D33.2 XS9.4
NetC36_1: C36.1 R39.1
NetC36_2: C36.2 DD1.87
NetC37_1: C37.1 R42.1
NetC37_2: C37.2 DD1.86
NetC38_1: C38.1 R43.1
NetC38_2: C38.2 DD1.91
NetC39_1: C39.1 R44.1
NetC39_2: C39.2 DD1.90
NetC40_1: C40.1 R40.1
NetC40_2: C40.2 DD1.95
NetC41_1: C41.1 R41.1
NetC41_2: C41.2 DD1.94
NetC42_2: C42.2 D32.6 D33.3 XS9.5
NetC43_2: C43.2 D32.5 D33.4 XS9.6
NetC44_2: C44.2 R23.2 R34.1 XS9.7
NetC45_2: C45.2 C50.2 LL9.1 R24.2 R29.2 R33.2 R48.2 XS8.1 XS8.2
NetC47_2: C47.2 R46.2 XS9.1
NetC48_2: C48.2 R38.2 R45.2 VT2.3
NetC49_2: C49.2 D31.7 R22.2 XS9.9
NetC51_2: C51.2 D31.5 R31.2 XS9.10
NetC52_1: C52.1 R41.2
NetC52_2: C52.2 LL12.1 R40.2
NetC53_1: C53.1 R44.2
NetC53_2: C53.2 LL11.1 R43.2
NetC54_1: C54.1 R42.2
NetC54_2: C54.2 LL10.1 R39.2
NetC55_2: C55.2 R47.2 R49.2 VT3.3
NetC59_2: C59.2 LL17.1 R50.2 R59.2 VD16.1 VD19.2 VD20.2
NetC60_1: C60.1 D34.8 R50.1 R53.1 R54.1 VD6.2 VD7.2 VD8.2
NetC61_2: C61.2 LL18.1 R53.2 R58.2 VD15.2 VD17.1 VD18.2
NetC62_2: C62.2 D34.7 R54.2 VT4.1
NetD28_1: D28.1 R15.2
NetD28_4: D28.4 DD1.103
NetD30_1: D30.1 XS6.3
NetD30_2: D30.2 XS6.2
NetD30_3: D30.3 XS6.1
NetD30_9: D30.9 R17.2 XP1.3
NetD30_32: D30.32 R49.1
NetD30_33: D30.33 R45.1
NetD30_40: D30.40 XS6.6
NetD30_41: D30.41 XS6.5
NetD30_42: D30.42 XS6.4
NetD31_6: D31.6 R27.2 R30.1
NetD34_5: D34.5 R59.1
NetD34_6: D34.6 R58.1
NetDD1_11: DD1.11 DD1.21 DD1.58 DD1.108 DD1.149 XS4.8
NetDD1_12: DD1.12 DD1.33 DD1.40 DD1.65 XP1.4
NetDD1_45: DD1.45 LL6.2
NetDD1_77: DD1.77 XS5.1
NetDD1_78: DD1.78 XS5.12
NetDD1_79: DD1.79 XS5.2
NetDD1_80: DD1.80 XS5.11
NetDD1_81: DD1.81 DD1.82 XS5.10
NetDD1_84: DD1.84 XS5.3
NetDD1_85: DD1.85 XS5.9
NetDD1_88: DD1.88 XS5.8
NetDD1_92: DD1.92 XS5.6
NetDD1_93: DD1.93 XS5.5
NetDD1_96: DD1.96 XS5.4
NetDD1_121: DD1.121 R13.2
NetDD1_125: DD1.125 XS4.1
NetDD1_127: DD1.127 XS4.2
NetDD1_128: DD1.128 XS4.3
NetDD1_129: DD1.129 XS4.4
NetDD1_131: DD1.131 DD1.132 XS4.5
NetDD1_133: DD1.133 DD1.134 XS4.6
NetDD1_136: DD1.136 XS4.7
NetDD1_137: DD1.137 XP2.2
NetDD1_138: DD1.138 XP2.3
NetDD1_139: DD1.139 XP2.1
NetDD1_141: DD1.141 R16.1
NetDD1_143: DD1.143 XP2.4
NetDD1_144: DD1.144 DD1.146 XP2.5
NetLL7_1: LL7.1 R26.2 R36.2 VD3.2 VD5.2
NetLL7_2: LL7.2
NetLL8_1: LL8.1 R25.2 R35.1 VD2.2 VD4.2
NetLL8_2: LL8.2
NetLL10_2: LL10.2 LL15.1 R55.2 VD9.3
NetLL11_2: LL11.2 LL13.1 R56.2 VD10.3
NetLL12_2: LL12.2 LL14.1 R57.2 VD11.3
NetLL13_2: LL13.2 XS11.2
NetLL14_2: LL14.2 XS11.1
NetLL15_2: LL15.2 XS11.3
NetLL16_1: LL16.1 R51.2 VD14.3
NetLL16_2: LL16.2
NetLL17_2: LL17.2 XS11.12
NetLL18_2: LL18.2 XS11.10
NetR2_1: R2.1 VT1.1
NetR4_1: R4.1 XS1.3
NetR5_1: R5.1 XS1.2
NetR20_2: R20.2 XS10.4
NetR21_1: R21.1 XP1.2
NetR28_1: R28.1 XP1.1
NetR37_1: R37.1 VT2.2
NetR46_1: R46.1 VT3.2
NetR48_1: R48.1 XS8.5
NetR51_1: R51.1 XS10.3
NetR52_1: R52.1 VD12.2 VD13.2 VD16.2 VD17.2
NetR52_2: R52.2 R60.2
NetR60_1: R60.1 VT4.3
NetVD6_1: VD6.1 XS11.9
NetVD12_1: VD12.1 XS10.2
NetVD12_3: VD12.3 VD16.3
NetVD13_1: VD13.1 XS10.1
NetVD13_3: VD13.3 VD17.3
OSD-CLK: C28.2 R33.1 XS7.3
PD0: D11.3 DD1.71
PD1: D11.4 DD1.70
PD2: D6.1 DD1.69
PD3: D6.2 DD1.68
PD4: D6.3 DD1.67
PD5: D6.4 DD1.66
PD6: D1.3 DD1.64
PD7: D1.4 DD1.63
PD8: D2.1 DD1.62
PD9: D2.2 DD1.57
PD10: D2.3 DD1.56
PD11: D2.4 DD1.55
PD12: D7.3 DD1.54
PD13: D7.4 DD1.53
PD14: D3.1 DD1.52
PD15: D3.2 DD1.51
PD16: D3.3 DD1.50
PD17: D3.4 DD1.48
PD18: D4.3 DD1.47
PD19: D4.4 DD1.46
PD20: D5.1 DD1.42
PD21: D5.2 DD1.39
PD22: D5.3 DD1.38
PD23: D5.4 DD1.37
PD24: D8.3 DD1.36
PD25: D8.4 DD1.35
PD26: D9.1 DD1.34
PD27: D9.2 DD1.32
PD28: D9.3 DD1.31
PD29: D9.4 DD1.29
PD30: D12.3 DD1.28
PD31: D12.4 DD1.27
PD32: D10.1 DD1.26
PD33: D10.2 DD1.25
PD34: D10.3 DD1.24
PD35: D10.4 DD1.23
PD36: D11.1 DD1.22
PD37: D11.2 DD1.20
PD38: D1.1 DD1.19
PD39: D1.2 DD1.17
PD40: D7.1 DD1.16
PD41: D7.2 DD1.15
PD42: D4.1 DD1.14
PD43: D4.2 DD1.13
PD44: D8.1 DD1.10
PD45: D8.2 DD1.9
PD46: D12.1 DD1.7
PD47: D12.2 DD1.6
PDE: DD1.43 R14.2
PHS: DD1.74 R18.1
PNL0: D11.6 D15.3 XS2.8
PNL1: D11.5 D15.4 XS2.9
PNL2: D6.8 D23.1 XS2.11
PNL3: D6.7 D23.2 XS2.12
PNL4: D6.6 D23.3 XS2.13
PNL5: D6.5 D23.4 XS2.14
PNL6: D1.6 D16.3 XS2.18
PNL7: D1.5 D16.4 XS2.19
PNL8: D2.8 D24.1 XS2.21
PNL9: D2.7 D24.2 XS2.22
PNL10: D2.6 D24.3 XS2.23
PNL11: D2.5 D24.4 XS2.24
PNL12: D7.6 D17.3 XS2.28
PNL13: D7.5 D17.4 XS2.29
PNL14: D3.8 D20.1 XS2.31
PNL15: D3.7 D20.2 XS2.32
PNL16: D3.6 D20.3 XS2.33
PNL17: D3.5 D20.4 XS2.34
PNL18: D4.6 D18.3 XS3.3
PNL19: D4.5 D18.4 XS3.4
PNL20: D5.8 D21.1 XS3.6
PNL21: D5.7 D21.2 XS3.7
PNL22: D5.6 D21.3 XS3.8
PNL23: D5.5 D21.4 XS3.9
PNL24: D8.6 D13.3 XS3.13
PNL25: D8.5 D13.4 XS3.14
PNL26: D9.8 D22.1 XS3.16
PNL27: D9.7 D22.2 XS3.17
PNL28: D9.6 D22.3 XS3.18
PNL29: D9.5 D22.4 XS3.19
PNL30: D12.6 D14.3 XS3.23
PNL31: D12.5 D14.4 XS3.24
PNL32: D10.8 D19.1 XS3.26
PNL33: D10.7 D19.2 XS3.27
PNL34: D10.6 D19.3 XS3.28
PNL35: D10.5 D19.4 XS3.29
PNL36: D11.8 D15.1 XS2.6
PNL37: D11.7 D15.2 XS2.7
PNL38: D1.8 D16.1 XS2.16
PNL39: D1.7 D16.2 XS2.17
PNL40: D7.8 D17.1 XS2.26
PNL41: D7.7 D17.2 XS2.27
PNL42: D4.8 D18.1 XS3.1
PNL43: D4.7 D18.2 XS3.2
PNL44: D8.8 D13.1 XS3.11
PNL45: D8.7 D13.2 XS3.12
PNL46: D12.8 D14.1 XS3.21
PNL47: D12.7 XS3.22
PNLVCC: C6.2 LL4.2 XS2.4 XS2.5
PPWR: DD1.76 R1.2
PVS: DD1.73 R19.1 R20.1
RESETn: D25.6 D27.2 DD1.100 R10.1
RST: D27.4 D30.7
SCL: D30.14 R8.2 R11.2
SDA: D30.13 R9.2 R12.2
SHFCLK: C10.1 C19.2 LL5.1 XS2.44
VREF: DD1.116 R29.1 XS6.8 XS7.2
pads on no net: D14.2 D25.1 D25.2 D25.3 D25.8 D27.1 D30.5 D30.6 D30.15 D30.16 D30.17 D30.18 D30.20 D30.21 D30.24 D30.25 D30.26 D30.27 D30.30 D30.31 D30.34 D30.35 D30.36 D30.37 D30.38 D30.39 D30.43 D30.44 DD1.2 DD1.3 DD1.4 DD1.5 DD1.44 DD1.59 DD1.60 DD1.75 DD1.83 DD1.89 DD1.97 DD1.130 DD1.135 DD1.145 DD1.147 DD1.152 DD1.153 DD1.154 DD1.155 DD1.156 DD1.157 XP2.7 XP2.8 XP2.9 XP2.10 XP2.11 XP2.12 XS2.1 XS2.2 XS2.3 XS2.36 XS5.7 XS6.9 XS6.10 XS6.11 XS6.12 XS7.9 XS7.10 XS7.11 XS7.12 XS8.7 XS8.8 XS8.9 XS8.10 XS8.11 XS8.12